# Altium PCB GateWayMainBoard.PcbDoc
Units mm, origin at the board's own origin, x right, y up, seen from the top; angles counter-clockwise.
Board outline 159.13 x 103.38 mm, 2 copper layers (Top Layer, Bottom Layer); 4 components, 10 nets, 107 pads, 4 vias.
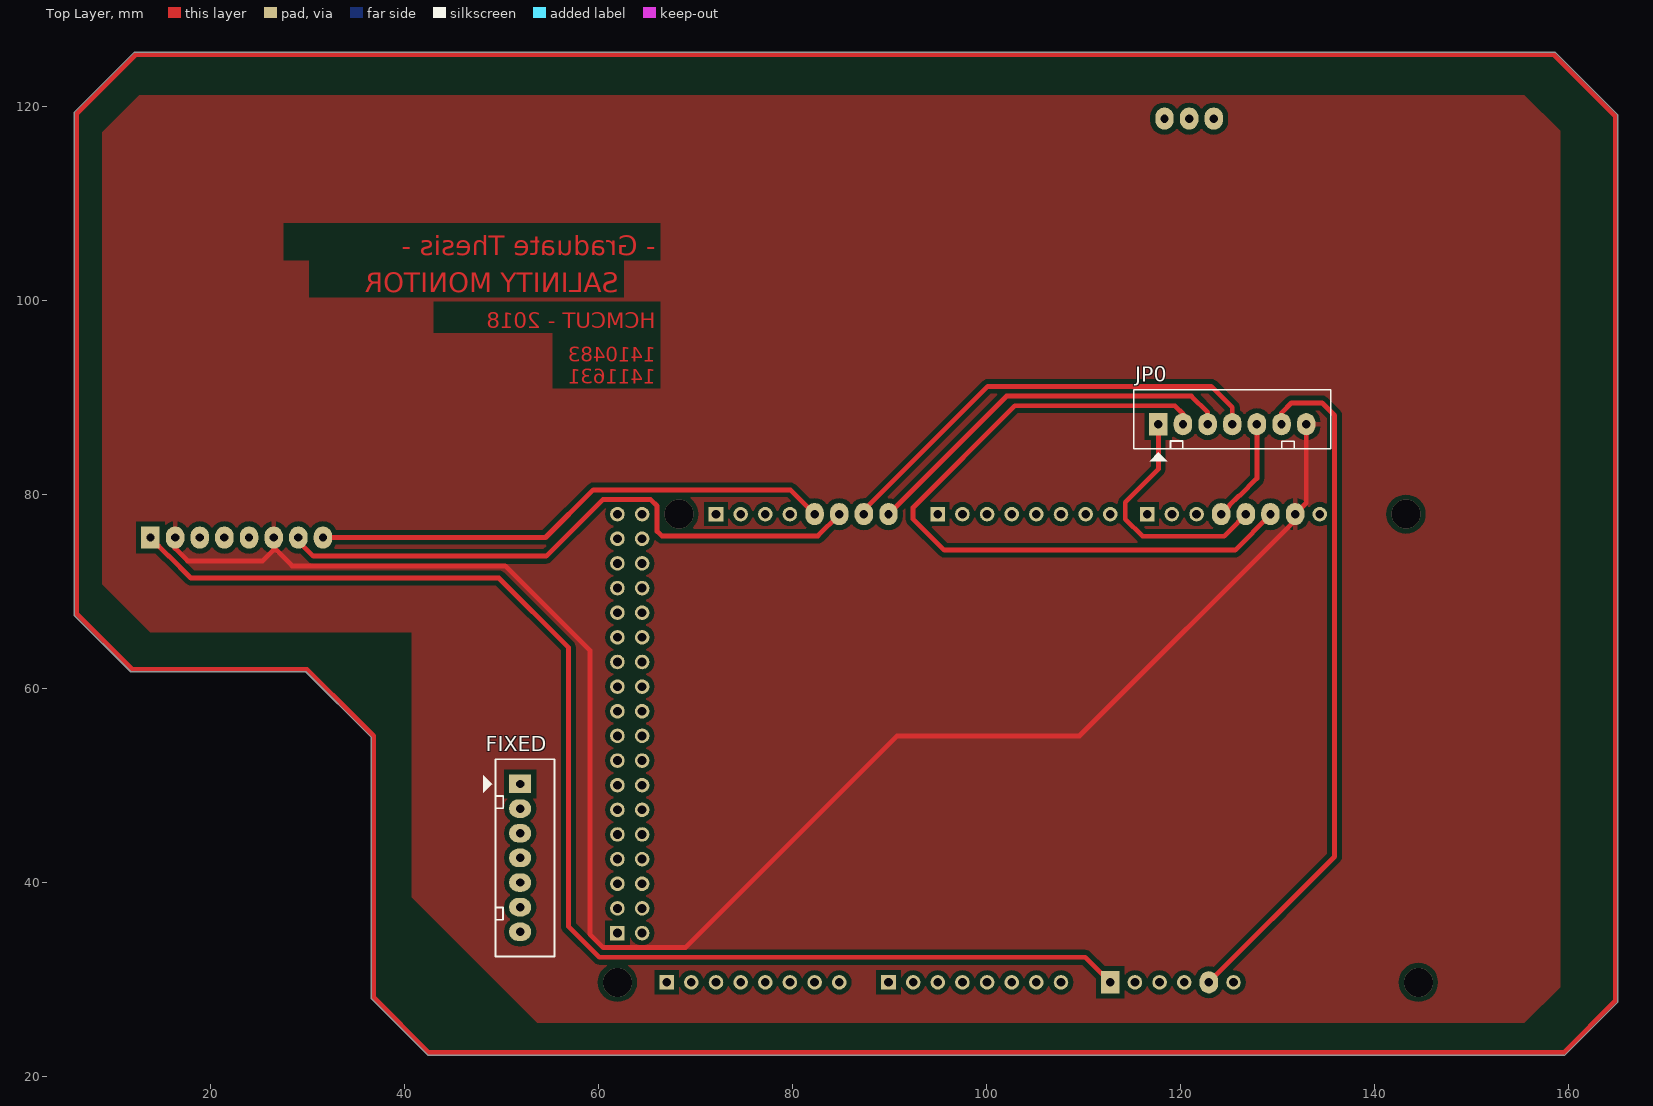
[diagram p0: Top Layer view]
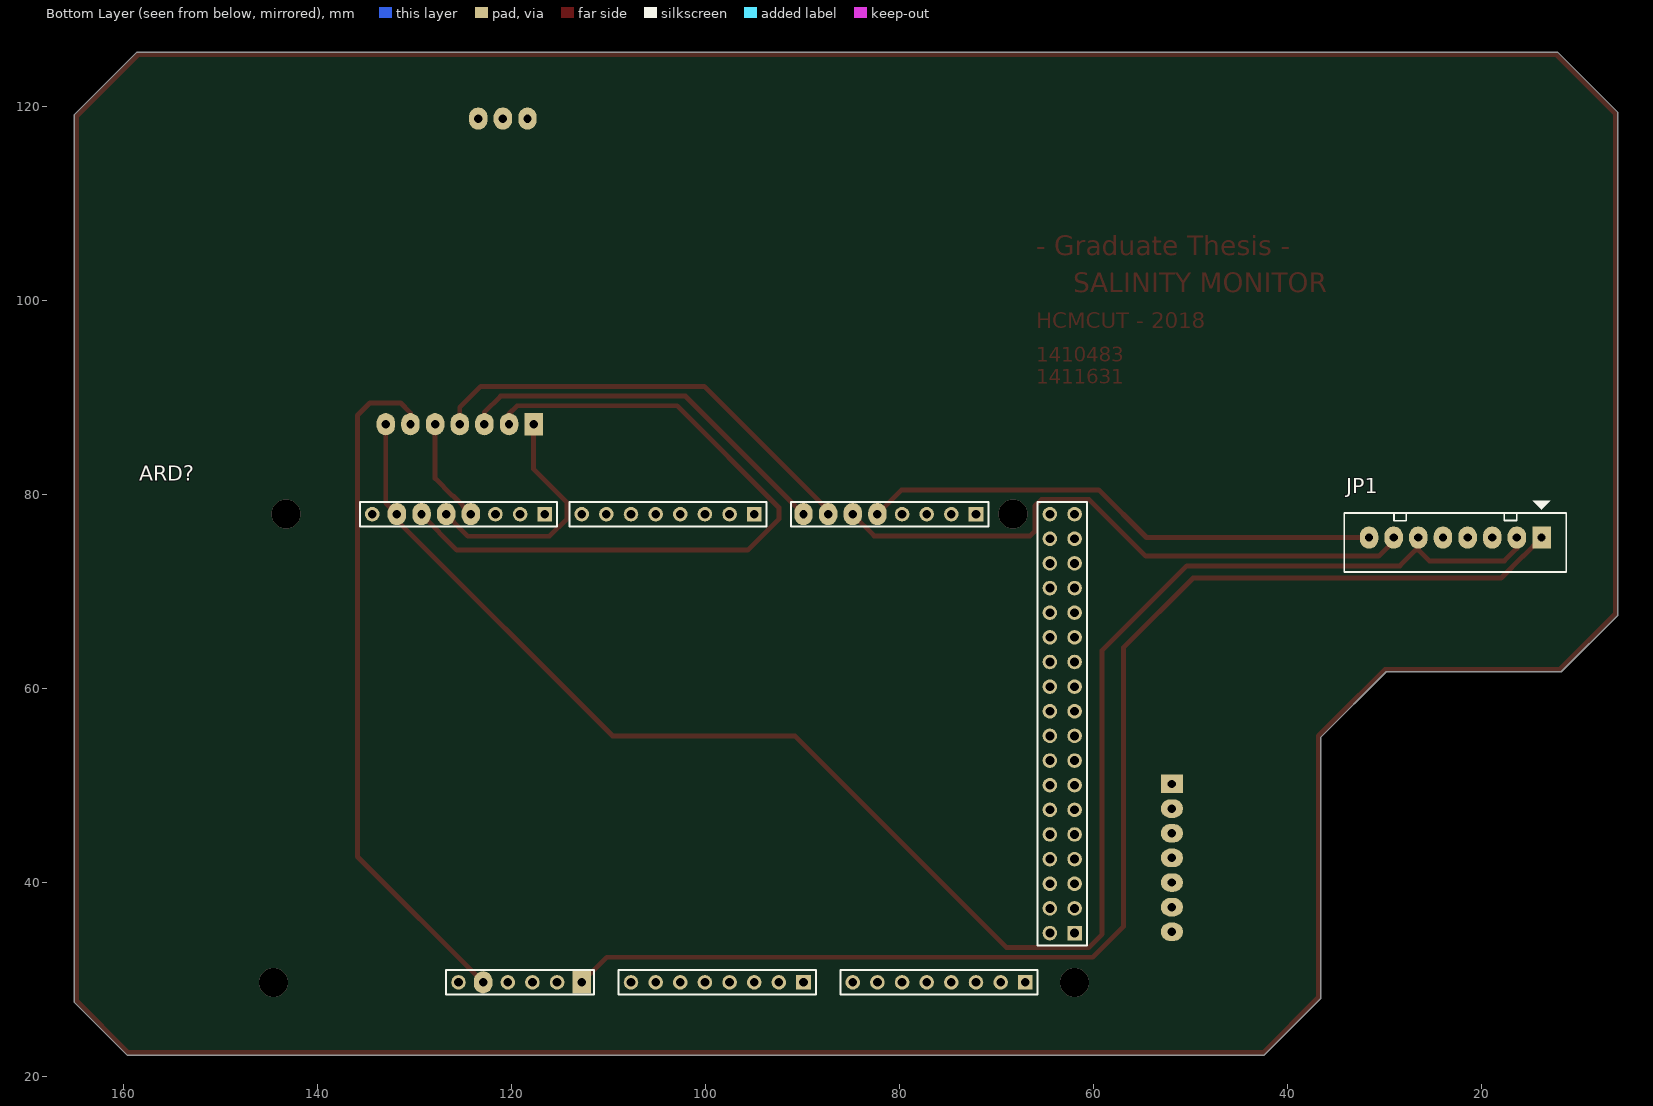
[diagram p1: Bottom Layer view, seen from below]

## Layer stack, top to bottom
Top Solder: solder mask 0.0102, Solder Resist, Dk 3.5
Top Layer: signal copper 0.0356
Dielectric 1: dielectric 0.32, FR-4, Dk 4.8
Bottom Layer: signal copper 0.0356
Bottom Solder: solder mask 0.0102, Solder Resist, Dk 3.5

## Board outline
5.969,67.564 11.811,61.722 29.845,61.722 36.576,54.991 36.576,28.067 42.418,22.225 159.639,22.225 165.1,27.686 165.1,119.126 158.623,125.603 12.192,125.603 5.969,119.38

## Design rules (kind name [scope] priority, off if disabled: settings)
Clearance [All] p1: gap=0.5
DiffPairsRouting [All] p1: maxlimit=0.5 minlimit=0.5 mostfreqgap=0.5 toplayer_minwidth=0.5 toplayer_maxwidth=0.5 toplayer_prefwidth=0.5 bottomlayer_minwidth=0.5 bottomlayer_maxwidth=0.5 bottomlayer_prefwidth=0.5 maxuncoupledlength=12.7
PolygonConnect [All] p1: connectstyle=Relief reliefconductorwidth=0.5 reliefentries=4 polygonreliefangle="90 Angle" airgapwidth=0.5
RoutingLayers [All] p1: top layer_v5=TRUE bottom layer_v5=FALSE
RoutingVias [All] p1: holewidth=0.5 width=0.5 viastyle="Through Hole" minholewidth=0.5 minwidth=0.5 maxholewidth=0.5 maxwidth=0.5
SolderMaskExpansion [All] p1: expansion=0.102
Width [All] p1: maxlimit=0.5 minlimit=0.5 preferedwidth=0.5
28 further rules are at their usual default settings.

## Classes and differential pairs
component class GateWayMainBoard: JP1

## Components (designator, comment, footprint, x,y, rotation, side; value= is the part's Value field where it differs from the comment)
ARD? "*" Arduino 105.156,55.118 r180 bottom
FIXED "LORA" CON7 51.943,50.165 r270 top (schematic designator JP0)
JP0 "LORA" CON7 117.729,87.249 r0 top
JP1 "SIM" CON8 13.843,75.565 r0 bottom

## Footprints (in the part's own frame and the unit in brackets; to place one, negate y for a bottom-side part, rotate by r counter-clockwise, add the part's x,y. Pads: shape width x height; smd on the part's side, far side on the other; paste and mask are expansions set on the pad)
Arduino [mm] "Arduino Mega 2560"
  rect 1.5x1.5 hole 0.9: 0(10.16,22.86) 8(-11.43,22.86) 21(33.02,22.86) 67(15.24,-25.4) 75(38.1,-25.4) 79(43.18,-20.32)
  round 1.5 hole 0.9: 1(7.62,22.86) 2(5.08,22.86) 3(2.54,22.86) 4(0,22.86) 5(-2.54,22.86) 6(-5.08,22.86) 7(-7.62,22.86) 9(-13.97,22.86) 10(-16.51,22.86) 18(25.4,22.86) 19(27.94,22.86) 20(30.48,22.86) 22(40.64,20.32) 23(43.18,20.32) 24(40.64,17.78) 25(43.18,17.78) 26(40.64,15.24) 27(43.18,15.24) 28(40.64,12.7) 29(43.18,12.7) 30(40.64,10.16) 31(43.18,10.16) 32(40.64,7.62) 33(43.18,7.62) 34(40.64,5.08) 35(43.18,5.08) 36(40.64,2.54) 37(43.18,2.54) 38(40.64,0) 39(43.18,0) 40(40.64,-2.54) 41(43.18,-2.54) 42(40.64,-5.08) 43(43.18,-5.08) 44(40.64,-7.62) 45(43.18,-7.62) 46(40.64,-10.16) 47(43.18,-10.16) 48(40.64,-12.7) 49(43.18,-12.7) 50(40.64,-15.24) 51(43.18,-15.24) 52(40.64,-17.78) 53(43.18,-17.78) 54(-20.32,-25.4) 56(-15.24,-25.4) 57(-12.7,-25.4) 58(-10.16,-25.4) 60(-2.54,-25.4) 61(0,-25.4) 62(2.54,-25.4) 63(5.08,-25.4) 64(7.62,-25.4) 65(10.16,-25.4) 66(12.7,-25.4) 68(20.32,-25.4) 69(22.86,-25.4) 70(25.4,-25.4) 71(27.94,-25.4) 72(30.48,-25.4) 73(33.02,-25.4) 74(35.56,-25.4) 77(-29.21,22.86) 78(40.64,-20.32) 80(43.18,22.86) 81(40.64,22.86)
  oval 1.905x2.286 hole 0.864: 11(-19.05,22.86) 12(-21.59,22.86) 13(-24.13,22.86) 14(15.24,22.86) 15(17.78,22.86) 16(20.32,22.86) 17(22.86,22.86) 55(-17.78,-25.4) 76(-26.67,22.86)
  rect 1.905x2.286 hole 0.864: 59(-7.62,-25.4)
  silkscreen extent -30.48,-26.67 44.45,24.13
CON7 [mil] "CON7"
  rect 75x90 hole 34: 1(0,0)
  oval 75x90 hole 34: 2(100,0) 3(200,0) 4(300,0) 5(400,0) 6(500,0) 7(600,0)
  silkscreen extent -100,-150 700,140
CON8 [mil] "CON8"
  rect 75x90 hole 34: 1(0,0)
  oval 75x90 hole 34: 2(100,0) 3(200,0) 4(300,0) 5(400,0) 6(500,0) 7(600,0) 8(700,0)
  silkscreen extent -100,-150 800,140

## Part data
ARD?: library part Arduino
FIXED JP0: library part Con7, "Connector 7"
JP1: library part Con8, "Connector 8"

## Free pads (board coordinates)
  oval 1.905x2.286 hole 0.864: ""(118.364,118.745) ""(120.904,118.745) ""(123.444,118.745)

## Via types
v1: diameter 3, hole 3, Top Layer to Bottom Layer, 4 vias

## Nets (pads, with @x,y where several pads share a name; then routed paths per layer and width w, separated by ;. In a path a pad name is that pad's centre, name@x,y a point inside that pad or via, vN(x,y) a via of type N, cw(c..) or ccw(c..) an arc to the next point about the centre after c; other vN are vias at no path point)
GND: ARD?.76 JP0.7 JP1.2 JP1.6 | length 181.6
  Top Layer w0.5: JP1.2 16.383,74.439 17.67,73.152 25.4,73.152 26.543,74.295 ; JP1.6 26.543,74.295 ; JP0.7 132.969,79.121 ARD?.76 131.826,77.343 109.601,55.118 90.805,55.118 68.985,33.298 60.528,33.298 59.131,34.695 59.131,63.932 50.419,72.644 28.448,72.644 26.797,74.295 26.543,74.295
NetARD?_11: ARD?.11 JP0.5 | length 10.8
  Top Layer w0.5: ARD?.11 125.044,78.816 125.044,78.874 126.041,79.871 126.099,79.871 127.889,81.661 JP0.5
NetARD?_12: ARD?.12 JP0.1 | length 25.3
  Top Layer w0.5: JP0.1 117.729,82.601 114.325,79.197 114.325,77.47 116.103,75.692 124.518,75.692 125.908,77.082 125.908,77.14 ARD?.12
NetARD?_13: ARD?.13 JP0.2 | length 74.5
  Top Layer w0.5: JP0.2 120.269,88.304 119.431,89.142 102.934,89.142 92.456,78.664 92.456,77.47 95.656,74.27 125.636,74.27 129.286,77.92 ARD?.13
NetARD?_14: ARD?.14 JP0.3 | length 39.8
  Top Layer w0.5: ARD?.14 102.08,90.142 121.142,90.142 122.809,88.475 JP0.3
NetARD?_15: ARD?.15 JP0.4 | length 46.3
  Top Layer w0.5: ARD?.15 87.376,78.359 100.159,91.142 123.19,91.142 125.349,88.983 JP0.4
NetARD?_16: ARD?.16 JP1.7 | length 63.2
  Top Layer w0.5: JP1.7 29.083,75.184 30.623,73.644 54.642,73.644 60.476,79.478 65.405,79.478 66.065,78.818 66.065,76.2 66.537,75.728 82.644,75.728 84.836,77.92 ARD?.16
NetARD?_17: ARD?.17 JP1.8 | length 53.7
  Top Layer w0.5: JP1.8 54.563,75.565 59.476,80.478 79.796,80.478 ARD?.17
NetARD?_55: ARD?.55 JP0.6 | length 71.4
  Top Layer w0.5: ARD?.55 135.89,42.672 135.89,88.163 134.62,89.433 131.445,89.433 130.429,88.417 JP0.6
VCC: ARD?.59 JP1.1 | length 134.8
  Top Layer w0.5: JP1.1 14.681,74.727 14.681,74.669 15.678,73.672 15.736,73.672 18.018,71.39 49.768,71.39 56.921,64.237 56.921,35.484 60.107,32.298 110.196,32.298 ARD?.59
pads on no net: ARD?.0 ARD?.1 ARD?.2 ARD?.3 ARD?.4 ARD?.5 ARD?.6 ARD?.7 ARD?.8 ARD?.9 ARD?.10 ARD?.18 ARD?.19 ARD?.20 ARD?.21 ARD?.22 ARD?.23 ARD?.24 ARD?.25 ARD?.26 ARD?.27 ARD?.28 ARD?.29 ARD?.30 ARD?.31 ARD?.32 ARD?.33 ARD?.34 ARD?.35 ARD?.36 ARD?.37 ARD?.38 ARD?.39 ARD?.40 ARD?.41 ARD?.42 ARD?.43 ARD?.44 ARD?.45 ARD?.46 ARD?.47 ARD?.48 ARD?.49 ARD?.50 ARD?.51 ARD?.52 ARD?.53 ARD?.54 ARD?.56 ARD?.57 ARD?.58 ARD?.60 ARD?.61 ARD?.62 ARD?.63 ARD?.64 ARD?.65 ARD?.66 ARD?.67 ARD?.68 ARD?.69 ARD?.70 ARD?.71 ARD?.72 ARD?.73 ARD?.74 ARD?.75 ARD?.77 ARD?.78 ARD?.79 ARD?.80 ARD?.81 FIXED.1 FIXED.2 FIXED.3 FIXED.4 FIXED.5 FIXED.6 FIXED.7 JP1.3 JP1.4 JP1.5
copper on no net: | length 501.9
  Top Layer w0.5: 6.223,67.691 11.938,61.976 29.972,61.976 35.179,56.769 36.83,55.118 36.83,28.194 42.545,22.479 159.512,22.479 164.846,27.813 164.846,118.999 158.496,125.349 12.319,125.349 6.223,119.253 6.223,67.691
  other v1: 61.976,29.718 144.526,29.718 68.326,77.978 143.256,77.978

## Polygon pours and split planes (outlines as drawn)
GND on Top Layer "TOP" (solid, pour order 0): 53.721,25.527 155.448,25.527 159.131,29.21 159.131,117.475 155.448,121.158 12.7,121.158 8.89,117.348 8.89,70.739 13.843,65.786 40.767,65.786 40.767,38.481

## Other copper
Top Layer:
  text "- Graduate Thesis -" at 65.913,104.648 h2
  text "SALINITY MONITOR" at 62.103,100.838 h2
  text "HCMCUT - 2018" at 65.913,97.155 h1.6
  text "1410483 / 1411631" at 65.913,91.44 h1.5